# Altium PCB TPS563249DDCR Breakout.PcbDoc
Units mm, origin at the board's own origin, x right, y up, seen from the top; angles counter-clockwise.
Board outline 48 x 18 mm, 2 copper layers (Top Layer, Bottom Layer); 22 components, 11 nets, 51 pads, 2 vias.
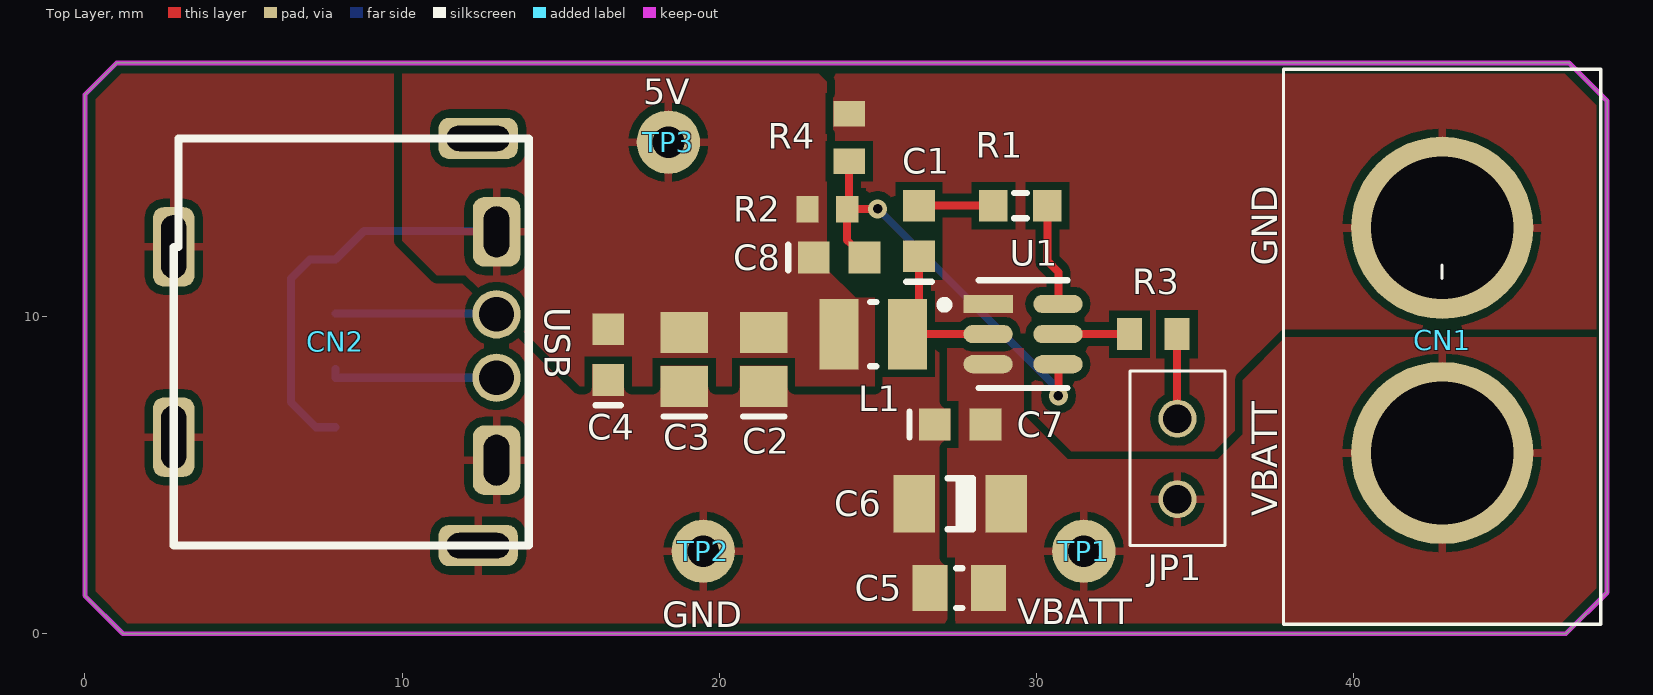
[diagram p0: Top Layer view]
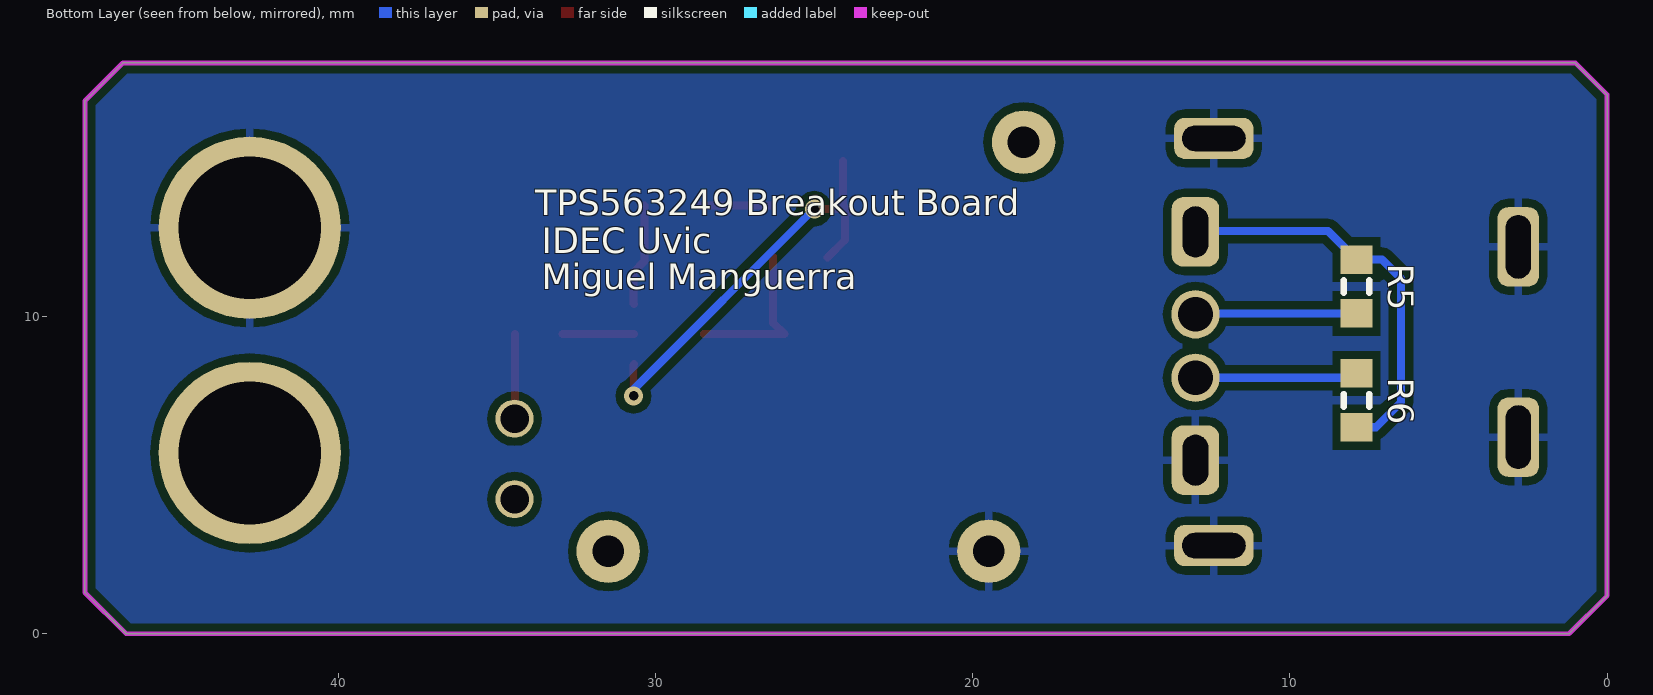
[diagram p1: Bottom Layer view, seen from below]
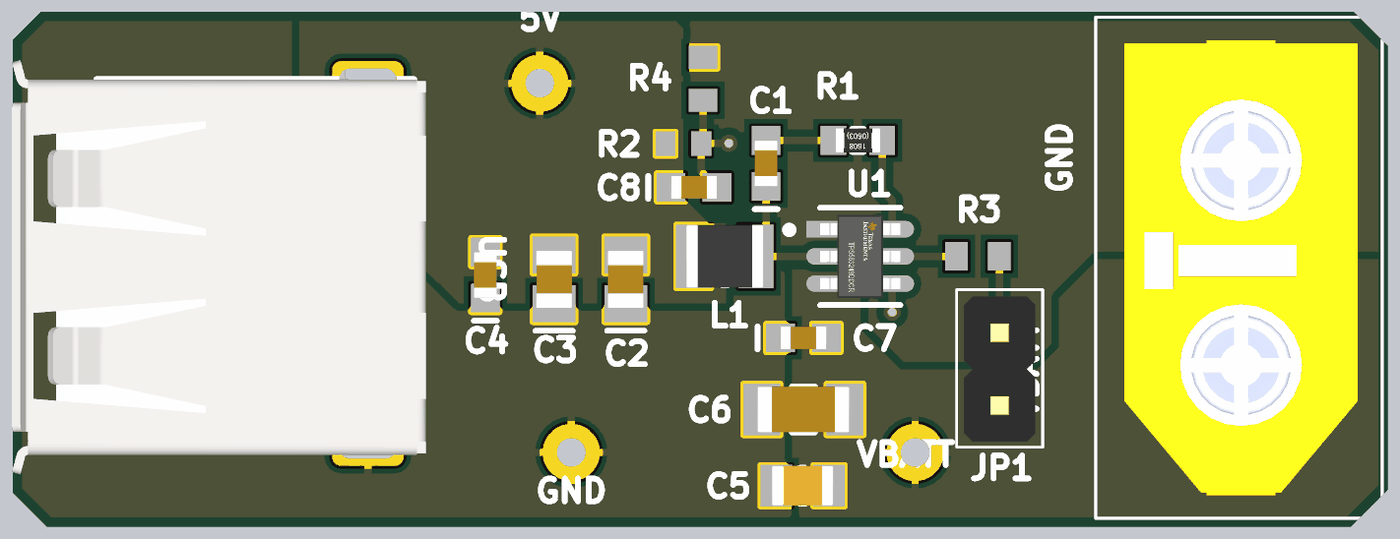
[diagram p2: 3D render of the assembled board from above, using the file's embedded part models]

## Layer stack, top to bottom
Top Solder: solder mask 0.0102, Solder Resist, Dk 3.5
Top Layer: signal copper 0.0356
Dielectric 1: dielectric 0.32, FR-4, Dk 4.8
Bottom Layer: signal copper 0.0356
Bottom Solder: solder mask 0.0102, Solder Resist, Dk 3.5

## Board outline
0,1.2 0,17 1,18 46.8,18 48,16.8 48,1.3 46.7,0 1.2,0

## Design rules (kind name [scope] priority, off if disabled: settings)
Clearance [All] p1: gap=0.254 ignorepadtopadclearanceinfootprint=FALSE except(0: Arc-Hole Track-Hole SMDPad-Hole THPad-Hole Via-Hole Fill-Hole Poly-Hole Region-Hole Text-Hole)
PolygonConnect [All] p1: thpad.connectstyle=Relief thpad.reliefconductorwidth=0.254 thpad.reliefentries=4 thpad.polygonreliefangle="90 Angle" thpad.airgapwidth=0.254 smdpad.connectstyle=Direct smdpad.reliefconductorwidth=0.254 smdpad.reliefentries=4 smdpad.polygonreliefangle="90 Angle" smdpad.airgapwidth=0.254 via.connectstyle=Direct via.reliefconductorwidth=0.254 via.reliefentries=4 via.polygonreliefangle="90 Angle" via.airgapwidth=0.254
RoutingVias [All] p1: holewidth=0.711 width=1.27 viastyle="Through Hole" minholewidth=0.711 minwidth=1.27 maxholewidth=0.711 maxwidth=1.27
SolderMaskExpansion [All] p1: expansion=0.102 istentingtop=FALSE
Width [All] p1: maxlimit=0.254 minlimit=0.254 preferedwidth=0.254
30 further rules are at their usual default settings.

## Components (designator, comment, footprint, x,y, rotation, side; value= is the part's Value field where it differs from the comment)
C1 "0.1uF, 50V, 10%, X7R, 0603" "CAPC1608N(0603\")" 26.3,12.7 r90 top
C2 "22uF 35V 0805 SMD, Ceramic" "CAPC2012N(0805\")" 21.4,8.65 r90 top value=22µF
C3 "22uF 35V 0805 SMD, Ceramic" "CAPC2012N(0805\")" 18.9,8.65 r90 top value=22µF
C4 "Placeholder_Capacitor_0603" "CAPC1608N(0603\")" 16.5,8.8 r90 top value=DNP
C5 "10uF, 25V, X5R, 0805" CAPC2013X12N 27.572,1.438 r180 top
C6 "Placeholder_Capacitor_1206" "CAPC3216N(1206\")" 27.6,4.1 r0 top value=DNP
C7 "0.1uF, 50V, 10%, X7R, 0603" "CAPC1608N(0603\")" 27.6,6.6 r0 top
C8 "Placeholder_Capacitor_0603" "CAPC1608N(0603\")" 23.784,11.862 r0 top value=DNP
CN1 "XT-60, Male, 1x2, Through hole" "XT-60 Male" 42.8,12.8 r270 top
CN2 "USB - Type A Female" "USB - Type A Female-Footprint-1" 12.98,9.073 r270 top
JP1 "1x2 Male Header" "2X1 Males Header" 34.452,6.782 r270 top
L1 "DFE252012P-1R5M=P2" INDC2520X12N 24.858,9.449 r180 top
R1 "0R, 1%, 1/10W, 0603 SMD" "RESC1608N(0603\")" 29.5,13.5 r180 top value=0R
R2 "ERJ-3EKF7322V" RESC1608X55X30LL15T15 23.413,13.386 r180 top
R3 "RC0603FR-0710KL" RESC1608X55X25ML10T15 33.69,9.449 r0 top
R4 "RC0603FR-0710KL" RESC1608X55X25ML10T15 24.1,15.65 r270 top
R5 "0R, 1%, 1/10W, 0603 SMD" "RESC1608N(0603\")" 7.9,10.95 r270 bottom value=0R
R6 "0R, 1%, 1/10W, 0603 SMD" "RESC1608N(0603\")" 7.9,7.362 r270 bottom value=0R
TP1 "Plated Hole, 1mm" PLATED_HOLE_1mm 31.5,2.6 r90 top
TP2 "Plated Hole, 1mm" PLATED_HOLE_1mm 19.5,2.6 r90 top
TP3 "Plated Hole, 1mm" PLATED_HOLE_1mm 18.4,15.5 r90 top
U1 "TPS563249DDCR" FP-DDC0005A-IPC_B 29.583,9.449 r0 top

## Footprints (in the part's own frame and the unit in brackets; to place one, negate y for a bottom-side part, rotate by r counter-clockwise, add the part's x,y. Pads: shape width x height; smd on the part's side, far side on the other; paste and mask are expansions set on the pad)
"2X1 Males Header" [mm]
  round 1.2 hole 0.9: 1(0,0) 2(2.54,0)
  silkscreen extent -1.5,-1.5 4,1.5, body extent -1.27,-1.24 3.81,1.25, height 8.54
"CAPC1608N(0603\")" [mm] "Chip Capacitor, Body 1.6x0.8mm (0603\"), IPC Medium Density"
  rect 1x1 smd: 1(-0.8,0) 2(0.8,0)
  silkscreen extent -1.6,-0.4 -1.6,0.4, body extent -0.8,-0.4 0.8,0.4, height 0.9
"CAPC2012N(0805\")" [mm] "Chip Capacitor, Body 2.0x1.3mm (0805\"), IPC Medium Density"
  rect 1.3x1.5 smd: 1(-0.85,0) 2(0.85,0)
  silkscreen extent -1.8,-0.65 -1.8,0.65, body extent -1,-0.62 1,0.63, height 1
CAPC2013X12N [mm] "Chip Capacitor, 2-Leads, Body 2.05x1.30mm, IPC Medium Density"
  rect 1.1x1.45 smd: 1(-0.925,0) 2(0.925,0)
  silkscreen extent -0.1,-0.63 0.1,0.63, body extent -1.07,-0.7 1.07,0.7, height 1.25
"CAPC3216N(1206\")" [mm] "Chip Capacitor, Body 3.2x1.6mm (1206\"), IPC Medium Density"
  rect 1.3x1.8 smd: 1(-1.45,0) 2(1.45,0)
  silkscreen extent -0.4,-0.8 0.4,0.8, body extent -1.6,-0.8 1.6,0.8, height 1
FP-DDC0005A-IPC_B [mm]
  rect 1.554x0.572 smd paste+0 mask+0: 1(-1.1,0.95)
  rrect100% 1.554x0.572 smd paste+0 mask+0: 2(-1.1,0) 3(-1.1,-0.95) 4(1.1,-0.95) 5(1.1,0) 6(1.1,0.95)
  silkscreen extent -2.6,-1.7 1.4,1.7, body extent -2.13,-1.7 2.13,1.7, height 0.25
INDC2520X12N [mm] "Chip Inductor, 2-Leads, Body 2.50x2.00mm, IPC Medium Density"
  rect 1.23x2.22 smd: 1(-1.085,0) 2(1.085,0)
  silkscreen extent -0.1,-1.01 0.1,1.01, body extent -1.35,-1.1 1.35,1.1, height 1.2
PLATED_HOLE_1mm [mm]
  round 2 hole 1: 1(0,0)
"RESC1608N(0603\")" [mm] "Chip Resistor, Body 1.6x0.8mm (0603\"), IPC Medium Density"
  rect 0.9x1 smd: 1(-0.85,0) 2(0.85,0)
  silkscreen extent -0.2,-0.4 0.2,0.4, body extent -0.77,-0.42 0.78,0.43, height 0.44
RESC1608X55X25ML10T15 [mm] "Chip Resistor, 2-Leads, Body 1.60x0.80mm, IPC Low Density"
  rect 0.8x1 smd: 1(-0.75,0) 2(0.75,0)
  body extent -0.85,-0.45 0.85,0.45, height 0.55
RESC1608X55X30LL15T15 [mm] "Chip Resistor, 2-Leads, Body 1.60x0.80mm, IPC High Density"
  rect 0.7x0.85 smd: 1(-0.625,0) 2(0.625,0)
  body extent -0.87,-0.48 0.88,0.48, height 0.55
"USB - Type A Female-Footprint-1" [mil]
  rrect50% 86.6x59.06 hole 31.5 slot 63 at 0 deg: 1(-141.74,0) 4(141.74,0)
  round 60 hole 43.31: 2(-39.38,0) 3(39.38,0)
  rrect50% 51.18x98.43 hole 31.5 slot 78.74 at 90 deg: 5(247.76,-22.83) 8(-257.75,-22.83)
  rrect50% 98.43x51.18 hole 31.5 slot 78.74 at 0 deg: 6(113.12,-400.78) 7(-123.11,-400.78)
  silkscreen extent -258,-401 248,40, body extent -310,-512 310,57, height 290
"XT-60 Male" [mm]
  round 5.75 hole 4.5: 1(0,0) 2(7.1,0)
  silkscreen extent -5,-5 12.5,5, body extent -4.2,-4 11.7,4.15, height 16.5

## Part data
C1 C7: library part CMP-006-0007-1, "0.1µF ±10% Ceramic Capacitor X7R 0603 (1608 Metric)", Capacitance=0.1µF, Operating Temperature="-55°C ~ 125°C", Package / Case="0603 (1608 Metric)", Component Type=Standard, ComponentLink1Description=Digi-Key, ComponentLink1URL=https://www.digikey.ca/product-detail/en/tdk-corporation/C1608X7R1H104M080AA/445-5098-1-ND/2093713, Created By="Poorna Chander Kalidas", Design Item ID="0.1uF, 50V, 10%, X7R, 0603", Mounting Type="Surface Mount, MLCC", Pin Count=2, Source=AUVic_Schematic_Library_Capacitors.SchLib
C2 C3: library part CMP-006-0036-1, "Capacitor, Ceramic, 35V, +/- 20%, 0805 SMD, X5R", Component Type=Standard, Design Item ID="22uF 35V 0805 SMD, Ceramic", PackageDescription="Chip Capacitor", Pin Count=2, Published=14-06-01, Publisher=AUVic, Source=AUVic_Schematic_Library_Capacitors.SchLib
C4 C8: library part CMP-006-0054-1, "Placeholder 0603 SMT Footprint", Component Type="Standard (No BOM)", Date Created=2016-06-26, Design Item ID=Placeholder_Capacitor_0603, Made By="Ashwin Sira", PackageDescription="Chip Capacitor", Pin Count=2, Publisher=AUVic, Source=AUVic_Schematic_Library_Capacitors.SchLib
C5: library part CMP-00114-1, "0805 10 uF 25 V ±10% Tolerance X5R SMT Multilayer Ceramic Capacitor", Capacitance=10uF, Case Code (Imperial)=0805, Case Code (Metric)=2012, Dielectric=X7R, Max Operating Temperature=85°C, Min Operating Temperature=-55°C, Package Quantity=1, Resistor Type=Ceramic, Tolerance=10%, Voltage Rating=25V, Case/Package=0805, Height=1.25mm, Lead Free="Lead Free", Length=0.079inch, Mount="Surface Mount", Number of Pins=2, Packaging="Tape and Reel", REACH SVHC="No SVHC", Termination=SMD/SMT, Thickness=0.053inch, Voltage Rating (DC)=25V, Width=0.049inch
C6: library part CMP-006-0056-1, "Placeholder 1206 SMT Footprint", Component Type="Standard (No BOM)", Date Created=2016-06-26, Design Item ID=Placeholder_Capacitor_1206, Made By="Ashwin Sira", PackageDescription="Chip Capacitor", Pin Count=2, Publisher=AUVic, Source=AUVic_Schematic_Library_Capacitors.SchLib
CN1: library part CMP-005-0041-1, Component Type="Standard (No BOM)", Date Published=2016-09-08, Design Item ID="XT-60, Male, 1x2, Through hole", Pin Count=2, Publisher="Andy Bates", Source=AUVic_Schematic_Library_Connectors.SchLib
CN2: library part CMP-00116-2, "USB - Type A Female USB 2.0 THT", LCSC Part #=C168725, Created By="Miguel Manguerra"
JP1: library part CMP-004-0001-1, Component Type=Standard, Design Item ID="1x2 Male Header", Made By="Andy Bates", Pin Count=2, Source=AUVic_Schematic_Library_Connectors.SchLib
L1: library part CMP-00112-1, "Ind Metal Alloy Shielded 1.5uH 20% 1MHz Powdered Iron 2.6A 1008 T/R", Case Code (Imperial)=1008, Case Code (Metric)=2520, Current Rating=3.5A, DC Resistance (DCR)=60mR, Inductance=1.5uH, Max DC Current=2.6A, Max Operating Temperature=125°C, Min Operating Temperature=-40°C, Resistor Type="Wirewound,Metal Alloy", Test Frequency=1MHz, Tolerance=20%, Case/Package=1008, Core Material=Ferrite, Depth=2mm, Height - Seated (Max)=0.039inch, Length=0.098inch, Mount="Surface Mount", Packaging="Tape and Reel", Shielding=Shielded, Width=0.079inch
R1 R5 R6: library part CMP-047-0001-1, Component Type=Standard, Created On=14-05-31, Design Item ID="0R, 1%, 1/10W, 0603 SMD", Last Edited=14-05-31, Made By="Ashwin Sira", Owned By=AUVic, Pin Count=2, Source=AUVic_Schematic_Library_Resistors.SchLib
R2: library part CMP-00029-1, "Res Thick Film 0603 73.2K Ohm 1% 0.1W(1/10W) ±100ppm/C Pad SMD Automotive T/R", Case Code (Imperial)=0603, Case Code (Metric)=1608, Max Operating Temperature=155°C, Max Power Dissipation=100mW, Min Operating Temperature=-55°C, Package Quantity=1, Resistance=73.2kR, Temperature Coefficient=100ppm/°C, Tolerance=1%, Voltage Rating=75V, Voltage Rating (DC)=50V, Case/Package=0603, Composition="Thick Film", Contact Plating=Tin, Depth=0.8mm, Features="Automotive AEC-Q200", Height=0.022inch, Lead Free="Lead Free", Length=1.6mm, Military Standard=Not, Mount="Surface Mount", Number of Terminations=2, Packaging="Tape and Reel", Power Rating=100mW, Radiation Hardening=No, REACH SVHC="No SVHC", Termination=SMD/SMT, Width=0.031inch
R3 R4: library part CMP-00037-1, "Res General Purpose Thick Film 0603 10K Ohm 1% 1/10W ±100ppm/°C Molded SMD Paper T/R", Case Code (Imperial)=0603, Case Code (Metric)=1608, Max Operating Temperature=155°C, Min Operating Temperature=-55°C, Power Rating=100mW, Resistance=10kR, Temperature Coefficient=100ppm/°C, Tolerance=1%, Voltage Rating=75V, Voltage Rating (DC)=50V, Case/Package=0603, Composition="Thick Film", Depth=0.8mm, Height=0.45mm, Lead Free="Lead Free", Lead Pitch=0.3mm, Length=1.6mm, Military Standard=Not, Number of Pins=2, Packaging="Tape and Reel", REACH SVHC="No SVHC", Termination=SMD/SMT, Weight=7.1E-05oz, Width=0.8mm
TP1 TP2 TP3: library part CMP-054-0000-1, Component Type="Standard (No BOM)", Created By="Ashwin Sira", Date Created=2016-07-10, Design Item ID="Plated Hole, 1mm", Pin Count=1, Publisher=AUVic, Source=AUVic_Integrated_Library_Virtual_Components.SchLib
U1: library part CMP-044-0004-1, "17-V, 3-A, constant 1.4-MHz synchronous step-down voltage regulator 6-SOT-23-THIN -40 to 125"

## Via types
v1: diameter 0.6, hole 0.3, Top Layer to Bottom Layer, tented both sides, 2 vias

## Nets (pads, with @x,y where several pads share a name; then routed paths per layer and width w, separated by ;. In a path a pad name is that pad's centre, name@x,y a point inside that pad or via, vN(x,y) a via of type N, cw(c..) or ccw(c..) an arc to the next point about the centre after c; other vN are vias at no path point)
5V: C2.2 C3.2 C4.2 C8.1 CN2.1 L1.2 R2.2 R5.1 R6.2 TP3.1 | length 12.7
  Bottom Layer w0.254: R6.2 7.288,6.512 6.5,7.3 6.5,11.2 7.1,11.8 R5.1 8.8,12.7 12.953,12.7 CN2.1
GND: C2.1 C3.1 C4.1 C5.2 C6.1 C7.1 CN1.1 CN2.4 CN2.5 CN2.6 CN2.7 CN2.8 R4.1 TP2.1 U1.1
NetC1_1: C1.1 L1.1 U1.2 | length 5.1
  Top Layer w0.254: C1.1 26.3,9.806 L1.1 U1.2
NetC1_2: C1.2 R1.2 | length 2.4
  Top Layer w0.254: C1.2 R1.2
NetC8_2: C8.2 R2.1 R4.2 U1.4 | length 13.8
  Top Layer w0.254: R2.1@23.9,13.3 24.038,13.438 R2.1 ; R4.2 24.1,13.448 R2.1@24.052,13.4 ; C8.2 24.038,12.408 R2.1 ; v1(25,13.4) R2.1@24.052,13.4 ; U1.4 30.7,8.483 v1(30.7,7.5) ; R2.1 R2.1@24.052,13.4
  Bottom Layer w0.254: v1(25,13.4) 30.7,7.7 v1(30.7,7.5)
NetCN2_2: CN2.2 R5.2 | length 5.2
  Bottom Layer w0.254: R5.2 12.953,10.1 CN2.2 CN2.2@12.907,10
NetCN2_3: CN2.3 R6.1 | length 5.7
  Bottom Layer w0.254: R6.1@7.9,8.35 7.9,8.073 CN2.3 CN2.3@12.753,8.3
NetJP1_1: JP1.1 R3.2 | length 2.7
  Top Layer w0.254: R3.2 34.44,6.794 JP1.1
NetR1_1: R1.1 U1.6 | length 3.3
  Top Layer w0.254: R1.1 30.35,11.75 30.7,11.4 30.7,10.415 U1.6
NetR3_1: R3.1 U1.5 | length 2.3
  Top Layer w0.254: U1.5 R3.1
VBATT: C5.1 C6.2 C7.2 CN1.2 JP1.2 TP1.1 U1.3

## Polygon pours and split planes (outlines as drawn)
GND on Top Layer "GND_L01_P002" (solid, remove dead copper, pour order 2): 0,18 48,18 47.8,0 0,0
5V on Top Layer "5V_L01_P001" (solid, pour order 1): 24.9,7.8 24.9,10.6 24.3,10.6 23.4,11.5 23.4,17.4 22.8,18 10,18 10,12.4 11.1,11.3 12,11.3 15.6,7.8
VBATT on Top Layer "VBATT_L01_P000" (solid, pour order 0): 29.6,9 29.6,6.9 31,5.5 35.725,5.5 36.512,6.288 36.512,8 37.856,9.344 48,9.344 48,0.055 46.645,0.055 27.2,0.055 27.2,8.6 27.2,9
GND on Bottom Layer "GND_L02_P003" (solid, pour order 3): 0,18 48,18 47.8,0 0,0

## Keep-outs
Keep-Out Layer:
  the board outline again, w0.152

## Silkscreen, mask and mechanical layers (free items; w line width, h text height)
Top Overlay:
  text "5V" at 17.6,16.7 h0.8
  text "GND" at 37.6,11.6 h0.8 r90
  text "USB" at 14.5,10.3 h0.8 r270
  text "VBATT" at 37.6,3.7 h0.8 r90
  text "VBATT" at 29.4,0.3 h0.8
  text "GND" at 18.2,0.2 h0.8
Bottom Overlay:
  text "TPS563249 Breakout Board" at 33.8,13.2 h0.8
  text "IDEC Uvic" at 33.6,12 h0.8
  text "Miguel Manguerra" at 33.6,10.867 h0.8